# Altium PCB PCB1.PcbDoc
Units mm, origin at the board's own origin, x right, y up, seen from the top; angles counter-clockwise.
Board outline 90.93 x 99.19 mm, 2 copper layers (Top Layer, Bottom Layer); 70 components, 36 nets, 210 pads, 26 vias.
Unrouted connection lines stored in the file: 4.
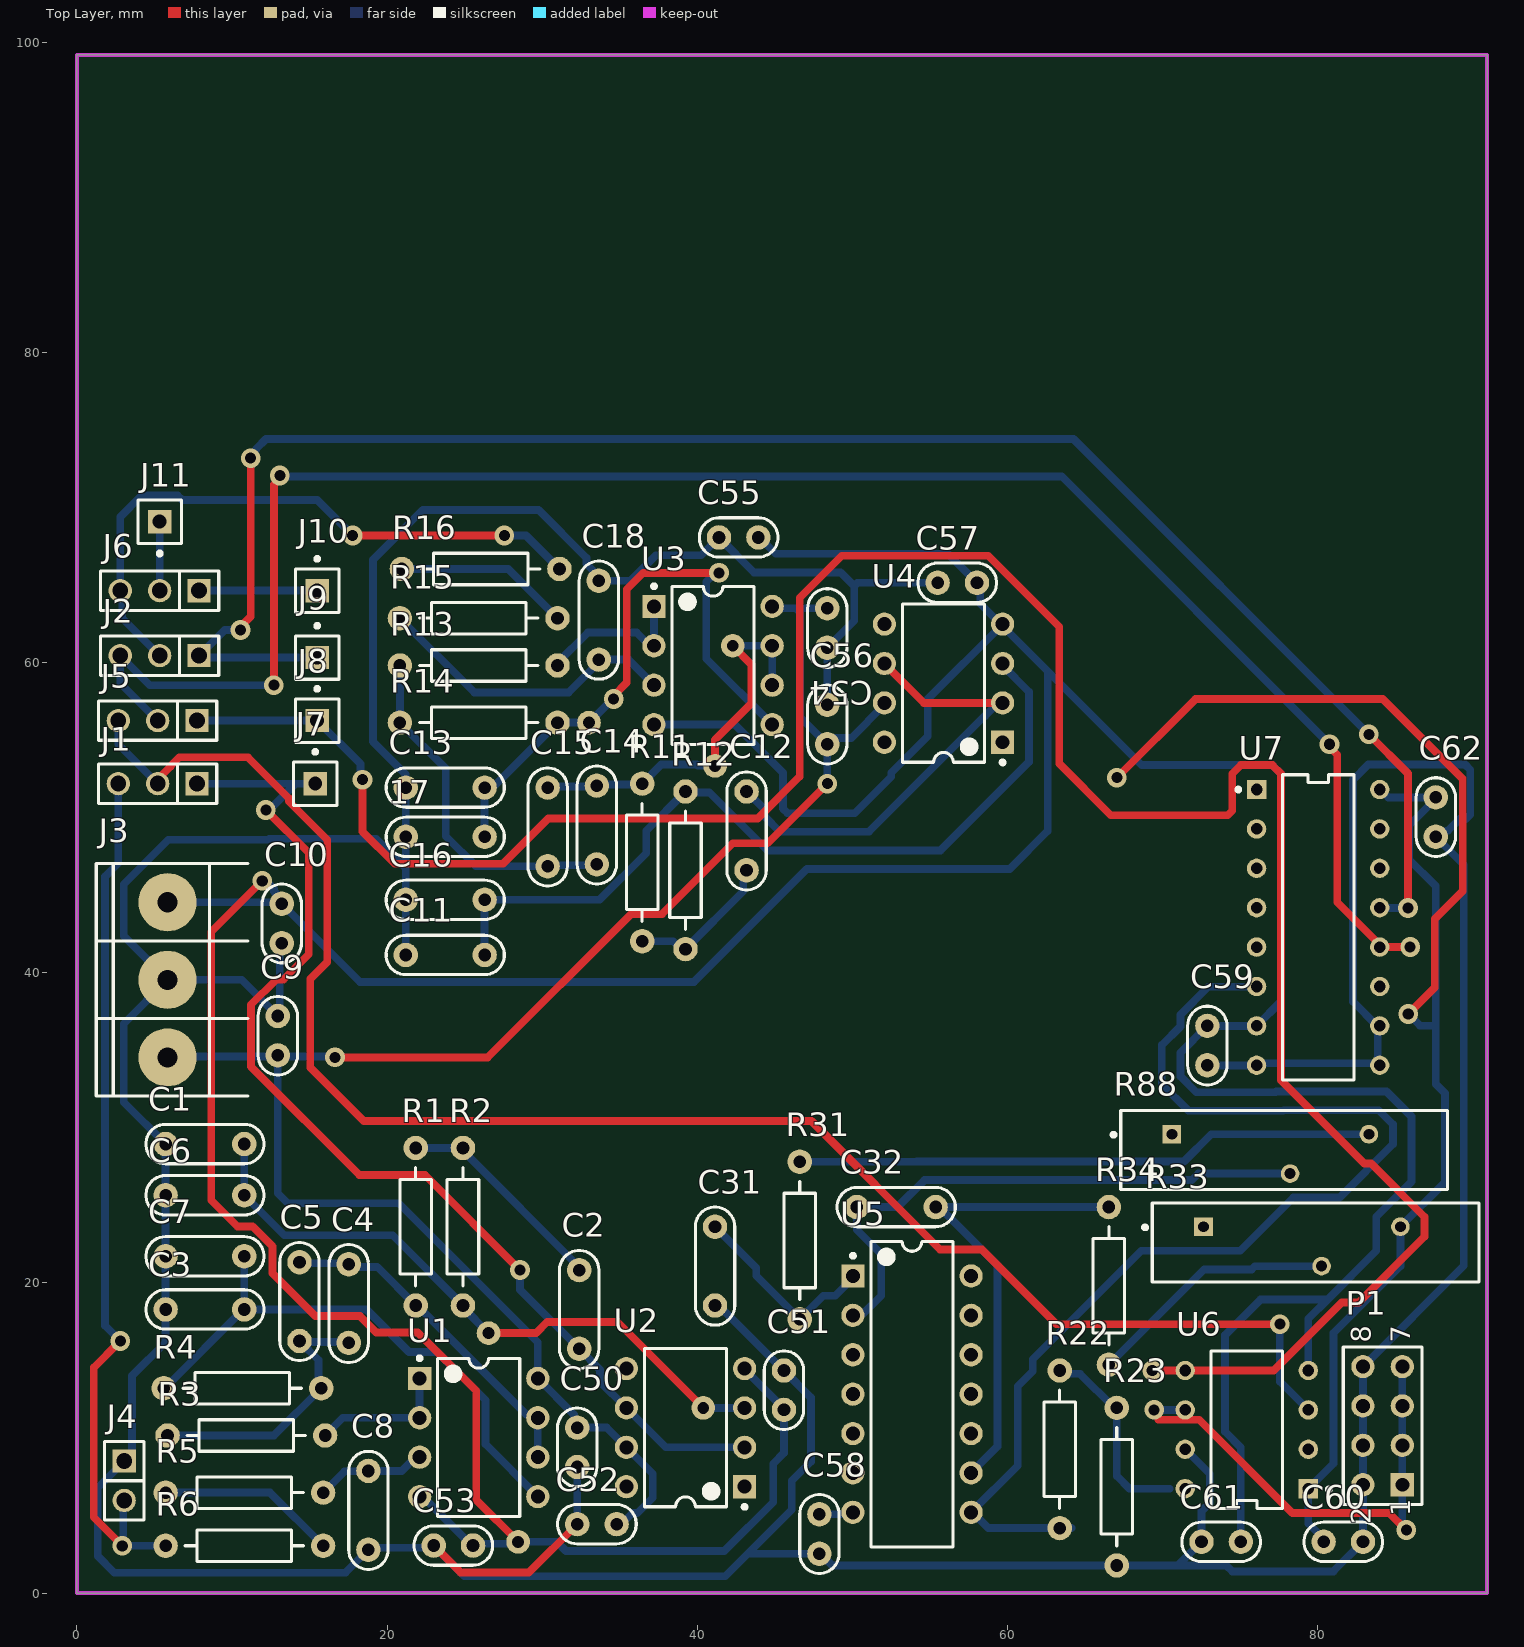
[diagram p0: Top Layer view]
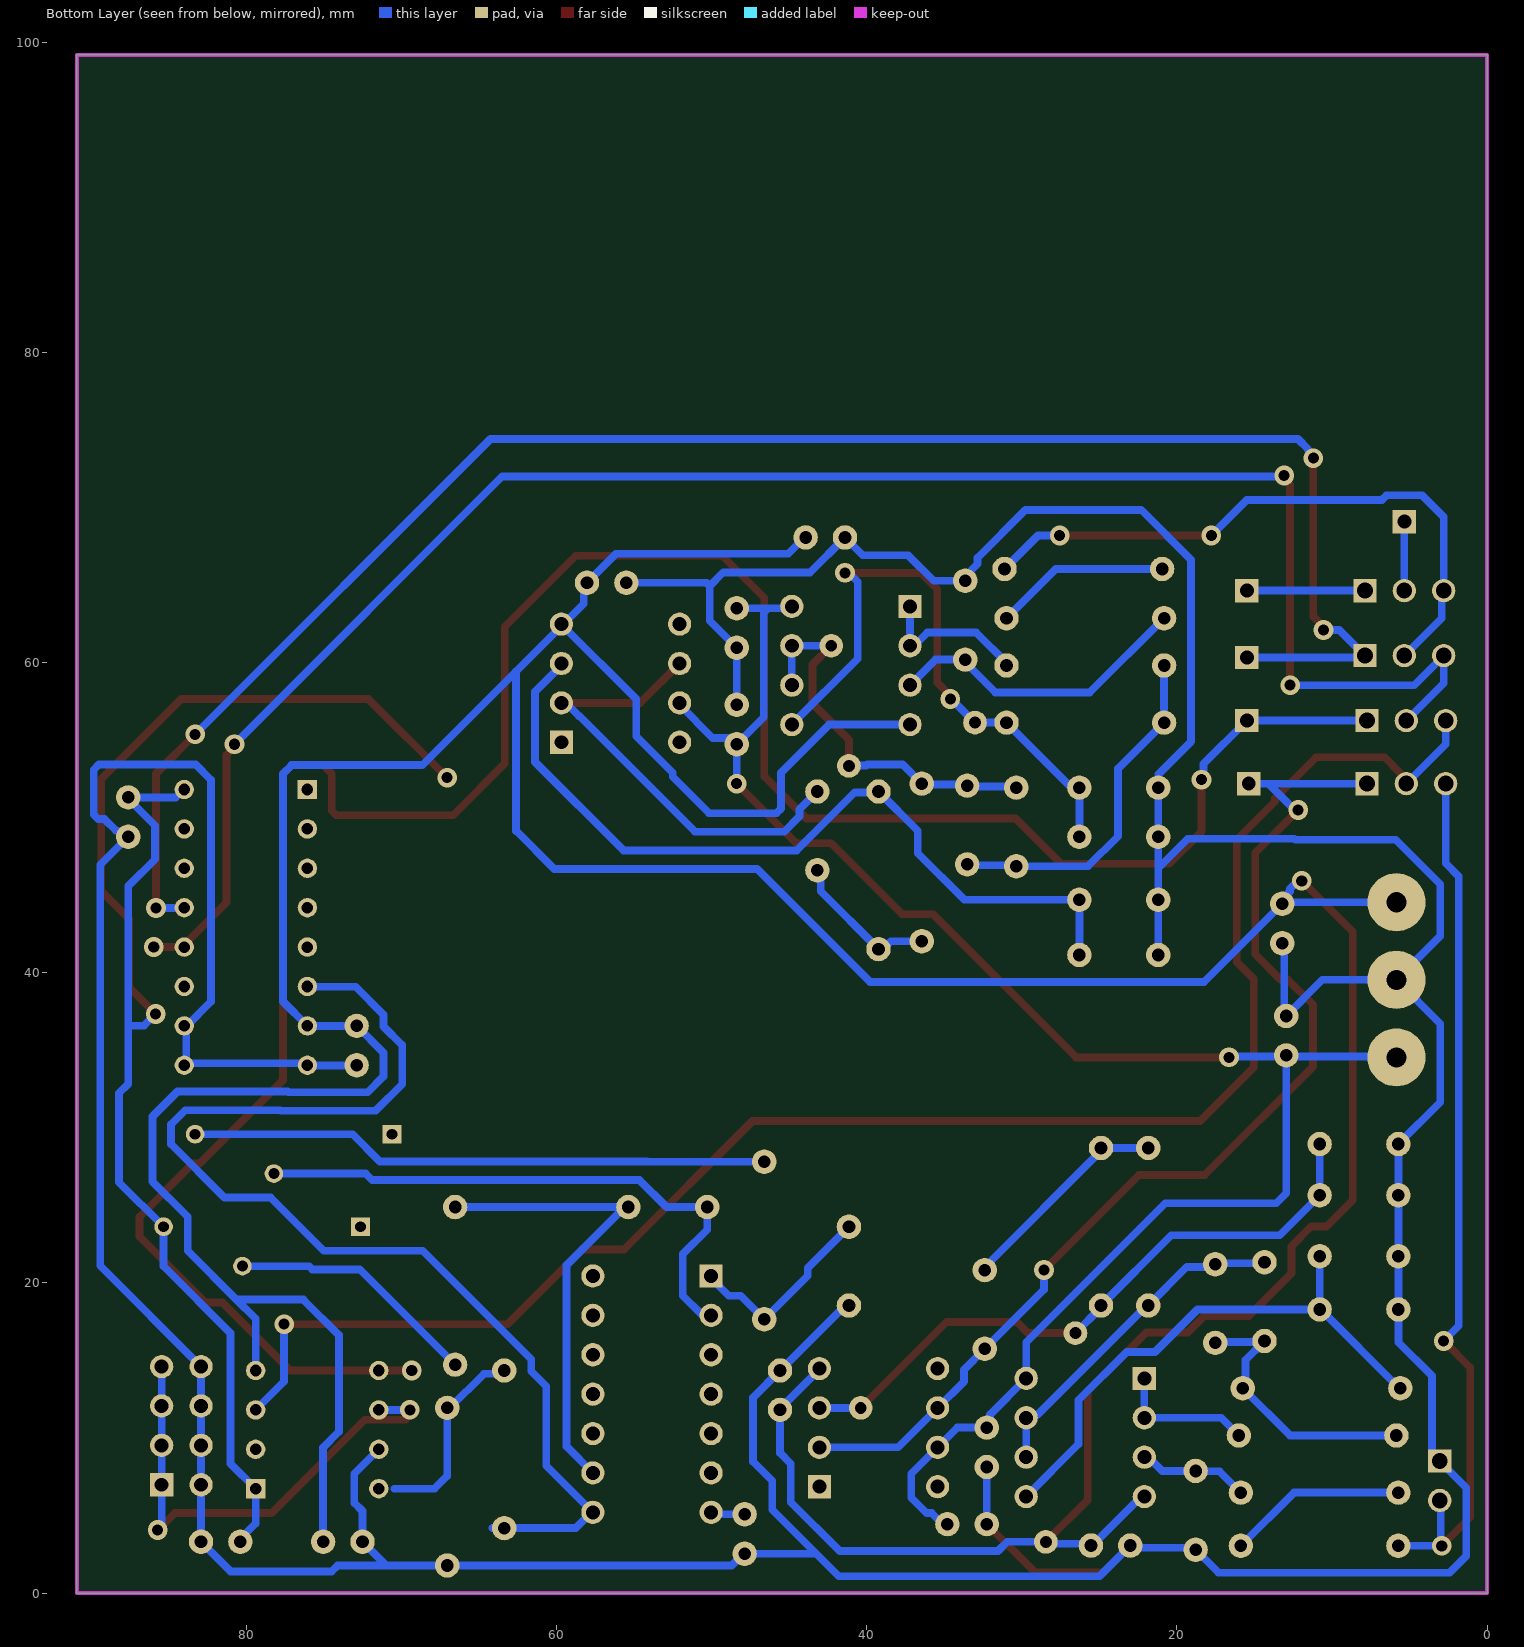
[diagram p1: Bottom Layer view, seen from below]
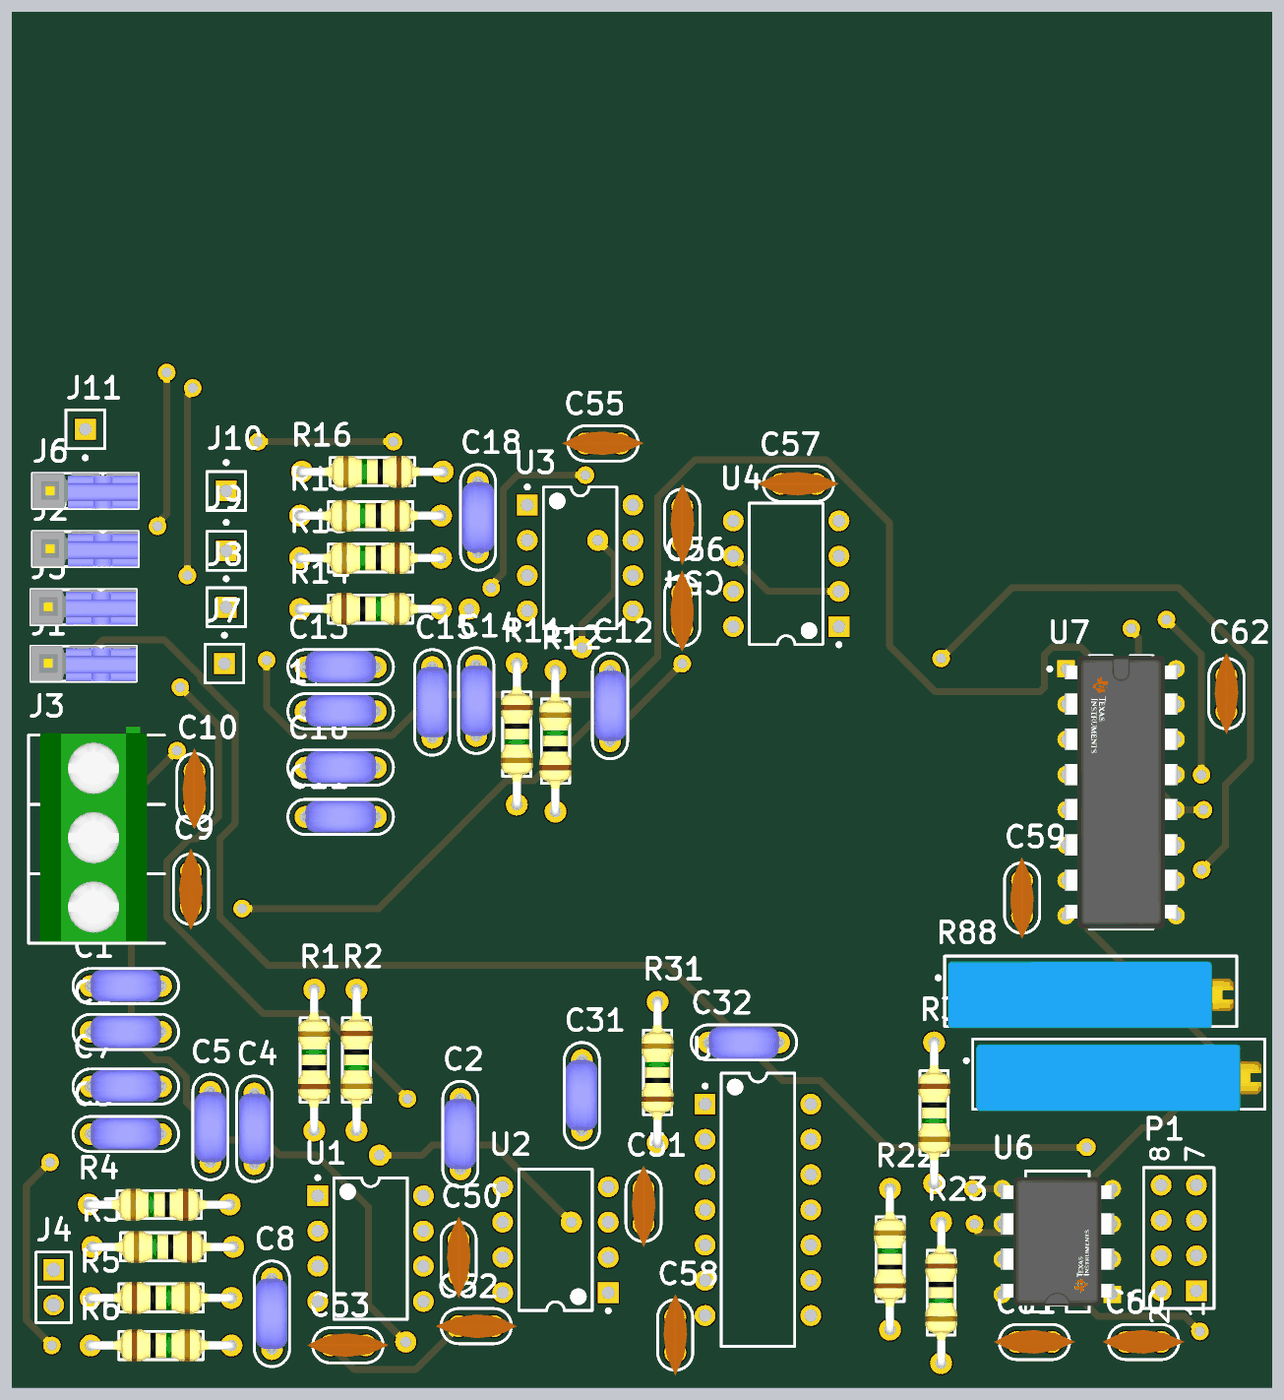
[diagram p2: 3D render of the assembled board from above, using the file's embedded part models]

## Layer stack, top to bottom
Top Solder: solder mask 0.0102, Solder Resist, Dk 3.5
Top Layer: signal copper 0.0356
Dielectric 1: dielectric 0.32, FR-4, Dk 4.8
Bottom Layer: signal copper 0.0356
Bottom Solder: solder mask 0.0102, Solder Resist, Dk 3.5

## Board outline
0,0 0,99.187 90.932,99.187 90.932,0

## Design rules (kind name [scope] priority, off if disabled: settings)
Clearance [All] p1: gap=0.7 ignorepadtopadclearanceinfootprint=FALSE
PolygonConnect [All] p1: connectstyle=Relief reliefconductorwidth=0.254 reliefentries=4 polygonreliefangle="90 Angle" airgapwidth=0.254
RoutingVias [All] p1: holewidth=0.7 width=2 viastyle="Through Hole" minholewidth=0.7 minwidth=2 maxholewidth=0.7 maxwidth=2
SolderMaskExpansion [All] p1: expansion=0.102 istentingtop=FALSE
Width [All] p1: maxlimit=1 minlimit=0.254 preferedwidth=0.5
30 further rules are at their usual default settings.

## Components (designator, comment, footprint, x,y, rotation, side; value= is the part's Value field where it differs from the comment)
17 "3.9p" CAP200 23.749,48.768 r180 top
C1 "120p" CAP200 8.255,28.956 r180 top
C2 "18n" CAP200 32.385,18.288 r270 top
C3 "82p" CAP200 8.255,18.288 r180 top
C4 "39p" CAP200 17.526,18.669 r90 top
C5 "820p" CAP200 14.351,18.796 r90 top
C6 "27p" CAP200 8.255,25.654 r180 top
C7 "3.9p" CAP200 8.255,21.717 r180 top
C8 "1n" CAP200 18.796,5.334 r270 top
C9 "10n" CAP100 12.954,35.941 r90 top
C10 "10n" CAP100 13.208,43.18 r90 top
C11 "120p" CAP200 23.749,41.148 r180 top
C12 "18n" CAP200 43.18,49.149 r90 top
C13 "82p" CAP200 23.749,51.943 r180 top
C14 "39p" CAP200 33.528,49.53 r90 top
C15 "820p" CAP200 30.353,49.403 r90 top
C16 "27p" CAP200 23.749,44.704 r180 top
C18 "1n" CAP200 33.655,62.738 r90 top
C31 "100p" CAP200 41.148,21.082 r270 top
C32 "100p" CAP200 52.832,24.892 r0 top
C50 "100n" CAP100 32.258,9.398 r270 top
C51 "100n" CAP100 45.593,13.081 r270 top
C52 "100n" CAP100 33.528,4.445 r180 top
C53 "100n" CAP100 24.273,3.064 r0 top
C54 "100n" CAP100 48.387,62.23 r270 top
C55 "100n" CAP100 42.672,68.072 r0 top
C56 "100n" CAP100 48.387,56.007 r90 top
C57 "100n" CAP100 56.769,65.151 r0 top
C58 "100n" CAP100 47.879,3.81 r270 top
C59 "100n" CAP100 72.898,35.306 r90 top
C60 "100n" CAP100 81.661,3.302 r0 top
C61 "100n" CAP100 73.787,3.302 r0 top
C62 "100n" CAP100 87.63,50.038 r270 top
J1 "JUMPER" JUMPER3 5.207,52.197 r180 top
J2 "JUMPER" JUMPER3 5.334,60.452 r180 top
J3 "BOR 3" BORNERA3 5.842,39.544 r0 top
J4 "CON2" SIP2 3.048,7.239 r270 top
J5 "JUMPER" JUMPER3 5.207,56.261 r180 top
J6 "JUMPER" JUMPER3 5.334,64.643 r180 top
J7 "Socket" PIN1 15.367,52.197 r0 top
J8 "Socket" PIN1 15.494,56.261 r0 top
J9 "Socket" PIN1 15.494,60.325 r0 top
J10 "Socket" PIN1 15.494,64.643 r0 top
J11 "Socket" PIN1 5.334,69.088 r180 top
P1 "Header 4X2" HDR2X4 85.471,6.985 r90 top
R1 "2.2k" RES400 21.844,18.542 r90 top
R2 "2.2k" RES400 24.892,28.702 r270 top
R3 "33k" RES400 16.002,10.16 r180 top
R4 "12k" RES400 15.748,13.208 r180 top
R5 "220" RES400 5.715,6.477 r0 top
R6 "12K" RES400 5.715,3.048 r0 top
R11 "2.2k" RES400 36.449,52.197 r270 top
R12 "2.2k" RES400 39.243,41.529 r90 top
R13 "33k" RES400 30.988,59.817 r180 top
R14 "12k" RES400 20.828,56.134 r0 top
R15 "220" RES400 30.988,62.865 r180 top
R16 "12K" RES400 31.115,66.04 r180 top
R22 "2k2" RES400 63.373,4.191 r90 top
R23 "2k2" RES400 67.056,11.938 r270 top
R31 "100k" RES400 46.609,17.653 r90 top
R33 "3006P-1-103LF" FP-3006P-MFG 79.879,22.607 r0 top
R34 "2k2" RES400 66.548,24.892 r270 top
R88 "3006P-1-103LF" FP-3006P-MFG 77.847,28.576 r0 top
U1 "TL082CP" P0008A 25.908,10.033 r0 top
U2 "LF356N" P0008A 39.243,10.668 r180 top
U3 "TL082CP" P0008A 41.021,59.817 r0 top
U4 "LF356N" P0008A 55.88,58.674 r180 top
U5 "CD40106BE" N0014A 53.848,12.827 r0 top
U6 "LF398N/NOPB" FP-P0008A-MFG 75.438,10.541 r180 top
U7 "CD4052BE" FP-N0016A-MFG 80.043,42.926 r0 top

## Footprints (in the part's own frame and the unit in brackets; to place one, negate y for a bottom-side part, rotate by r counter-clockwise, add the part's x,y. Pads: shape width x height; smd on the part's side, far side on the other; paste and mask are expansions set on the pad)
BORNERA3 [mm] "Bornera con Tornillos 5mm separación"
  round 3.75 hole 1.3: 1(0,5) 2(0,0) 3(0,-5)
  silkscreen extent -4.6,-7.5 5.2,7.5, body extent -3.76,-7.39 3.94,8.11, height 10.05
CAP100 [mil]
  round 62 hole 32: 1(-50,0) 2(50,0)
  silkscreen extent -100,-50 100,50, body extent -115,-33 115,34, height 241
CAP200 [mil]
  round 62 hole 32: 1(-100,0) 2(100,0)
  silkscreen extent -150,-50 150,50, body extent -110,-46 110,44, height 246
FP-3006P-MFG [mm]
  rect 1.2x1.2 hole 0.7 paste-1000 mask+0: 1(-7.235,1.015)
  round 1.2 hole 0.7 paste-1000 mask+0: 2(0.385,-1.525) 3(5.465,1.015)
  silkscreen extent -11.12,-2.54 10.54,2.54, body extent -10.64,-2.64 10.64,2.64, height 0.25
FP-N0016A-MFG [mm]
  rect 1.25x1.25 hole 0.75 paste-1000 mask+0: 1(-3.97,8.89)
  round 1.25 hole 0.75 paste-1000 mask+0: 2(-3.97,6.35) 3(-3.97,3.81) 4(-3.97,1.27) 5(-3.97,-1.27) 6(-3.97,-3.81) 7(-3.97,-6.35) 8(-3.97,-8.89) 9(3.97,-8.89) 10(3.97,-6.35) 11(3.97,-3.81) 12(3.97,-1.27) 13(3.97,1.27) 14(3.97,3.81) 15(3.97,6.35) 16(3.97,8.89)
  silkscreen extent -5.27,-9.84 2.3,9.84, body extent -4.69,-9.94 4.69,9.94, height 0.25
FP-P0008A-MFG [mm]
  rect 1.25x1.25 hole 0.75 paste-1000 mask+0: 1(-3.97,3.81)
  round 1.25 hole 0.75 paste-1000 mask+0: 2(-3.97,1.27) 3(-3.97,-1.27) 4(-3.97,-3.81) 5(3.97,-3.81) 6(3.97,-1.27) 7(3.97,1.27) 8(3.97,3.81)
  silkscreen extent -5.42,-5.08 2.3,5.08, body extent -4.69,-5.18 4.69,5.18, height 0.25
HDR2X4 [mm] "Connector; Header; 4x2 Position"
  rect 1.5x1.5 hole 0.9: 1(0,0)
  round 1.5 hole 0.9: 2(0,2.54) 3(2.54,0) 4(2.54,2.54) 5(5.08,0) 6(5.08,2.54) 7(7.62,0) 8(7.62,2.54)
  silkscreen extent -1.27,-1.27 8.89,3.81
JUMPER3 [mm]
  rect 1.5x1.5 hole 1.016: 1(-2.54,0)
  round 1.5 hole 1.016: 2(0,0) 3(2.54,0)
  silkscreen extent -3.81,-1.27 3.81,1.27, body extent -3.81,-1.3 3.81,1.27, height 16.15
N0014A [mm] "DIP, 14-Leads, Body 19.7x6.6mm, Pitch 2.54mm"
  rect 1.5x1.5 hole 0.9: 1(-3.81,7.62)
  round 1.5 hole 0.9: 2(-3.81,5.08) 3(-3.81,2.54) 4(-3.81,0) 5(-3.81,-2.54) 6(-3.81,-5.08) 7(-3.81,-7.62) 8(3.81,-7.62) 9(3.81,-5.08) 10(3.81,-2.54) 11(3.81,0) 12(3.81,2.54) 13(3.81,5.08) 14(3.81,7.62)
  silkscreen extent -3.93,-9.85 2.65,9.85, body extent -3.95,-9.85 3.95,9.85, height 5.08
P0008A [mm] "DIP, 8-Leads, Body 10.15x6.6mm, Pitch 2.54mm"
  rect 1.5x1.5 hole 0.9: 1(-3.81,3.81)
  round 1.5 hole 0.9: 2(-3.81,1.27) 3(-3.81,-1.27) 4(-3.81,-3.81) 5(3.81,-3.81) 6(3.81,-1.27) 7(3.81,1.27) 8(3.81,3.81)
  silkscreen extent -3.93,-5.1 2.65,5.23, body extent -3.95,-5.07 3.95,5.07, height 5.08
PIN1 [mm] "Connector; Plug"
  rect 1.5x1.5 hole 0.9: 1(0,0)
  silkscreen extent -1.4,-1.4 1.4,2.17
RES400 [mil]
  round 62 hole 32: 1(0,0) 2(400,0)
  silkscreen extent 50,-40 350,40, body extent -12,-45 412,46, height 96
SIP2 [mm]
  rect 1.5x1.5 hole 1.016: 1(-1.27,0)
  round 1.5 hole 1.016: 2(1.27,0)
  silkscreen extent -2.54,-1.27 2.54,1.27

## Part data
17 C1 C2 C3 C4 C5 C6 C7 C8 C9 C10 C11 C12 C13 C14 C15 C16 C18 C31 C32 C50 C51 C52 C53 C54 C55 C56 C57 C58 C59 C60 C61 C62: library part CAP
J1 J2 J5 J6: library part JUMPER3
J3: library part "BORNERA 3"
P1: "Header, 4-Pin, Dual row", LatestRevisionDate=17-Jul-2002, LatestRevisionNote="Re-released for DXP Platform.", Publisher="Altium Limited"
R1 R2 R3 R4 R5 R6 R11 R12 R13 R14 R15 R16 R22 R23 R31 R34: library part RES
R33 R88: library part CMP-07234-000047-1, "TRIMMER 10KOHM 0.75W PC PIN SIDE", Color=Blue, Insulation Resistance=1GR, Manufacturer Series=3006, Max Operating Temperature=125°C, Max Power Dissipation=750mW, Min Operating Temperature=-55°C, Package Quantity=100, Resistance=10kR, Resistance Law=Linear, Resistance Tolerance=10%, Resistor Type=Cermet, Temperature Coefficient=100ppm/°C, Actuator Orientation=Horizontal, Actuator Type=SCREW, Depth=4.83mm, Height=6.35mm, Lead Free="Lead Free", Length=20.57mm, Military Standard=Not, Mount=Panel, Number of Pins=3, Number of Terminals/Pins=3, Number of Turns=15, Packaging=Rail/Tube, Pin Diameter=0.6mm, Pitch=2.5mm, Power Rating=750mW, Radiation Hardening=No, REACH SVHC="No SVHC", RoHS Compliant=Yes, Series=3006, Taper=Linear, Technology=CERMET, Terminal Finish=Tin, Termination=Pin, Thickness=5.59mm, Tolerance=10%, Type=Potentiometer, Weight=0.04oz, Width=4.83mm
U1 U3: library part CMP-0055-00158-5, "JFET-Input Operational Amplifier, 7 to 36 V, 0 to 70 degC, 8-pin DIP (P8), Pb-Free (RoHS)", Manufacturer="Texas Instruments", Rating=Catalog, Total Supply Voltage(Max)(+5V is 5, +/-5V is 10)=36, Total Supply Voltage(Min)(+5V is 5, +/-5V is 10)=7, CMRR(Min)(dB)=70, Code_JEDEC=MS-001, ComponentLink1Description="Manufacturer URL", ComponentLink1URL=http://www.ti.com/, ComponentLink2Description=Datasheet, ComponentLink2URL=http://www.ti.com/lit/ds/symlink/tl082.pdf, ComponentLink3Description="Package Specification", ComponentLink3URL=http://www.ti.com/litv/pdf/mpdi001b, DatasheetVersion=SLOS081G, Eco-Plan="Pb-Free (RoHS)", GBW(Typ)(MHz)=3, IIB(Max)(pA)=400, Iq per channel(Max)(mA)=2.8, Mounting Technology="Through Hole", Number of Channels=2, Offset Drift(Typ)(uV/C)=18, PackageDescription="8-Pin Plastic In-Line, Body 9.59 x 6.35 mm, Pitch 2.54 mm", PackageReference=P0008A, PackageVersion="4040082/E, 04/2010", PartNumber=TL082CP, Slew Rate(Typ)(V/us)=13, Sub Family="General Purpose Amplifier, High Supply Voltage Amplifier (>=30V)", Vio (25C)(Max)(mV)=15, Vn at 1kHz(Typ)(nV/rtHz)=18
U2 U4: library part CMP-0055-00204-3, "JFET Input Operational Amplifier, 8-pin MDIP", Manufacturer="Texas Instruments", Package Reference=P0008A, PackageTopMarking=NSUZXYTTE#*LF*356N, PowerWise=N, Code_JEDEC=MS-001-BA, ComponentLink1Description="Datasheet URL", ComponentLink1URL=http://www.ti.com/general/docs/lit/getliterature.tsp?genericPartNumber=LF356&fileType=pdf, CompType=Amplifiers, PackageDescription="MDIP, .365 x .250 x .130in, 8 Lead, .100in Pitch", PinCount=8, RoHS=N
U5: library part CMP-1615-00909-3, "CMOS Hex Schmitt Triggers, N0014A, TUBE", F @ Nom Voltage(Max)(Mhz)=12, Generic Part Number=CD40106B, ICC @ Nom Voltage(Max)(mA)=0.03, Manufacturer="Texas Instruments", Operating Temperature Range(C)="-55 to 125", Rating=Catalog, tpd @ Nom Voltage(Max)(ns)=280, Voltage(Nom)(V)=5, Bits(#)=6, Code_JEDEC=MS-001, DatasheetVersion=SCHS097D, Input Type=CMOS, Output Drive (IOL/IOH)(Max)(mA)=-1/1, Output Type=CMOS, PackageReference=N0014A, Schmitt Trigger=Yes, Technology Family=CD4000, VCC(Max)(V)=18, VCC(Min)(V)=3
U6: library part CMP-04895-000240-1, "IC OPAMP SAMPL/HOLD 1 CIRC 8DIP", Case/Package=PDIP, Dual Supply Voltage=15V, Input Bias Current=10nA, Input Offset Voltage (Vos)=2mV, Max Dual Supply Voltage=18V, Max Operating Temperature=70°C, Min Dual Supply Voltage=5V, Min Operating Temperature=0°C, Nominal Supply Current=4.5mA, Package Quantity=40, Bandwidth=1MHz, Contact Plating=Tin, Gain Bandwidth Product=1MHz, Height=3.3mm, Lead Free="Lead Free", Length=9.27mm, Max Supply Voltage=18V, Min Supply Voltage=5V, Mount="Through Hole", Number of Amplifiers=1, Number of Channels=1, Number of Circuits=1, Number of Pins=8, Operating Supply Voltage=15V, Packaging=Rail/Tube, Radiation Hardening=No, REACH SVHC="No SVHC", RoHS Compliant=Yes, Series=LF398-N, Supply Current=4.5mA, Weight=0.032805oz, Width=6.35mm
U7: library part CMP-1575-00066-5, "IC MUX/DEMUX DUAL 4X1 16DIP", Case/Package=PDIP, Max Dual Supply Voltage=9V, Max Input Voltage=20V, Max Operating Temperature=125°C, Min Dual Supply Voltage=2.5V, Min Operating Temperature=-55°C, Min Supply Voltage=3V, Nominal Supply Current=80nA, On-State Resistance=240R, Operating Supply Voltage=18V, Package Quantity=25, Bandwidth=25MHz, Contact Plating=Gold, Lead Free="Lead Free", Logic Function=Multiplexer, Max Supply Voltage=20V, Mount="Through Hole", Number of Bits=4, Number of Channels=2, Number of Circuits=2, Number of Inputs=8, Number of Outputs=2, Number of Pins=16, Number of Terminals/Pins=16, Operating Supply Current=80nA, Packaging=Rail/Tube, Polarity=Non-Inverting, Propagation Delay=60ns, Quiescent Current=80nA, Radiation Hardening=No, REACH SVHC="No SVHC", RoHS Compliant=Yes, Supply Type=Single, Throw Configuration=SP4T, Turn-Off Delay Time=450ns, Turn-On Delay Time=720ns, Weight=0.03357oz, Width=7.62mm
J7 J8 J9 J10 J11: LatestRevisionDate=17-Jul-2002, LatestRevisionNote="Re-released for DXP Platform.", Publisher="Altium Limited"

## Free pads (board coordinates)
  round 1.524 hole 0.762: 2(40.386,11.938) 4(26.543,16.764) 6(28.448,3.302) 10(33.02,56.134) 13(41.148,53.34) 14(42.291,61.087)

## Via types
v1: diameter 1.27, hole 0.711, Top Layer to Bottom Layer, 26 vias

## Nets (pads, with @x,y where several pads share a name; then routed paths per layer and width w, separated by ;. In a path a pad name is that pad's centre, name@x,y a point inside that pad or via, vN(x,y) a via of type N, cw(c..) or ccw(c..) an arc to the next point about the centre after c; other vN are vias at no path point)
-VCC: C10.2 C51.2 C53.2 C55.2 C57.2 C59.2 C61.2 J3.1 pad.6 U1.4 U2.4 U3.4 U4.4 U6.4 U7.7 | length 320.7
  Top Layer w0.5: v1(11.949,45.924) 8.667,42.642 8.667,25.325 10.347,23.645 11.324,23.645 12.614,22.355 12.614,20.616 15.364,17.866 18.246,17.866 19.307,16.805 21.98,16.805 25.747,13.038 25.747,6.003 pad.6
  Bottom Layer w0.5: J3.1 C10.2@13.114,44.544 ; v1(11.949,45.924) 12.097,45.777 12.352,45.777 12.71,45.419 12.71,45.239 13.114,44.835 C10.2@13.114,44.544 ; U1.4 22.3,6.223 25.46,3.064 C53.2 25.662,3.183 28.329,3.183 pad.6@28.448,3.064 ; pad.6 30.944,3.302 31.538,2.708 41.746,2.708 44.901,5.862 44.901,8.345 45.593,9.037 C51.2 45.593,11.874 43.053,14.414 U2.4 ; U3.4 42.427,56.007 45.534,52.9 45.534,50.585 45.827,50.292 50.165,50.292 52.51,52.637 52.51,52.9 54.864,55.254 54.864,57.658 U4.4@59.563,62.357 ; C55.2 44.011,68.072 45.064,67.019 56.171,67.019 C57.2 58.245,64.945 58.245,63.802 62.611,59.436 ; C61.2 75.057,9.385 74.041,10.401 74.041,16.637 76.327,18.923 80.645,18.923 ; U7.7@75.93,36.56 75.922,36.568 72.906,36.568 C59.2 71.161,34.839 71.161,33.316 72.178,32.299 77.299,32.299 77.342,32.341 84.451,32.341 86.062,30.73 86.062,26.532 83.794,24.264 83.794,22.072 80.645,18.923 ; U7.7 77.648,38.151 77.648,52.835 77.092,53.391 68.689,53.391 68.672,53.375 62.611,59.436 ; U6.4 79.408,17.686 80.645,18.923 ; C10.2@13.114,44.544 C10.2 18.247,39.411 39.792,39.411 47.073,46.692 60.154,46.692 62.611,49.149 62.611,59.436
GND: 17.2 C1.2 C3.2 C6.2 C7.2 C8.2 C9.2 C10.1 C11.2 C13.2 C16.2 C18.2 C31.2 C50.2 C51.1 C52.2 C53.1 C54.2 C55.1 C56.2 C57.1 C58.2 C59.1 C60.2 C61.1 C62.2 J3.2 J4.1 P1.2 P1.4 P1.6 P1.8 R23.2 U6.7 U7.8 U7.9 U7.10 | length 381
  Top Layer w0.5: C53.1 24.74,1.326 29.139,1.326 C52.2
  Bottom Layer w0.5: C10.1 13.081,41.783 13.081,37.338 C9.2 10.621,39.544 J3.2 ; C11.2 C16.2 21.209,46.736 ; C52.2 C50.2 ; C31.2 41.393,18.542 45.584,14.351 C51.1 47.33,12.614 47.33,8.468 46.101,7.239 46.101,5.365 43.355,2.619 ; C56.2@48.387,57.531 C54.2 50.124,62.697 50.124,64.938 ; C57.1 50.338,65.151 50.124,64.938 ; U6.7 73.043,7.696 73.043,5.815 72.517,5.289 C61.1@72.517,3.429 ; C61.1 70.993,1.778 ; C59.1 72.906,34.028 75.922,34.028 U7.8@75.93,34.02 ; U7.8@75.946,34.163 83.886,34.163 83.886,36.576 83.87,36.56 82.295,38.135 82.295,52.452 83.269,53.426 89.515,53.426 89.855,53.086 89.855,50.204 89.562,49.911 89.154,49.911 88.408,49.165 88.317,49.165 87.921,48.768 C62.2 89.425,46.973 89.425,21.099 P1.8 P1.6 P1.4 P1.2 C60.2 81.026,1.397 74.505,1.397 74.124,1.778 70.993,1.778 ; J3.2 3.017,36.719 3.017,31.654 C1.2 C6.2 C7.2 C3.2 5.715,16.175 3.548,14.008 3.548,9.009 J4.1 1.336,6.797 1.336,2.391 2.417,1.311 17.313,1.311 C8.2 18.931,2.929 22.868,2.929 C53.1 24.989,1.077 41.813,1.077 43.355,2.619 ; J3.2 3.017,42.369 3.017,45.714 5.883,48.58 12.363,48.58 12.424,48.641 19.304,48.641 21.209,46.736 ; 21.209,46.736 17.2 C13.2 21.209,52.788 19.091,54.906 19.091,66.633 22.308,69.85 29.762,69.85 32.852,66.76 32.852,66.371 33.655,65.569 C18.2 35.687,65.278 37.338,66.929 40.259,66.929 C55.1 43.655,65.819 49.243,65.819 50.124,64.938 ; 43.355,2.619 43.434,2.54 C58.2 47.947,2.54 48.709,1.778 R23.2 70.993,1.778
InFAA: J1.3 J4.2 R6.1 | length 56.8
  Top Layer w0.5: v1@2.667,16.129 1.077,14.539 1.077,4.892 v1(2.921,3.048)
  Bottom Layer w0.5: J1.3 2.667,47.061 1.817,46.211 1.817,17.238 2.794,16.261 v1(2.794,16.256) ; v1(2.921,3.048) 2.984,3.111 2.984,5.905 J4.2 ; v1@3.048,3.048 R6.1
InFR: J2.2 J6.3 R16.1 | length 40.9
  Top Layer w0.5: v1(17.78,68.199) v1(27.559,68.199)
  Bottom Layer w0.5: J2.2 2.914,62.872 2.914,64.523 J6.3 2.794,69.392 4.19,70.788 6.478,70.788 6.781,70.485 15.494,70.485 v1(17.78,68.199) ; v1(27.559,68.199) 28.956,68.199 R16.1
InKey: J2.3 J5.2 U7.12 | length 120.8
  Top Layer w0.5: v1(12.7,58.547) 12.7,71.481 13.081,71.862 v1(13.081,72.07) ; v1(80.772,54.737) 80.772,54.567 81.28,54.059 81.28,44.542 84.013,41.809 U7.12 v1(85.979,41.656)
  Bottom Layer w0.5: J5.2 2.794,58.674 J2.3 4.699,58.547 v1(12.7,58.547) ; v1(13.081,72.07) 13.142,72.009 63.5,72.009 v1(80.772,54.737)
InSH: J1.2 J5.3 U6.3 | length 110.1
  Top Layer w0.5: J1.2 5.207,52.468 6.047,53.308 6.047,53.341 6.603,53.897 11.023,53.897 13.667,51.253 13.667,51.053 16.145,48.575 16.145,40.693 15.052,39.6 15.052,33.887 18.5,30.439 47.368,30.439 55.66,22.147 58.362,22.147 63.171,17.338 v1(77.572,17.338)
  Bottom Layer w0.5: J5.3 2.667,54.737 J1.2 ; v1(77.572,17.338) 77.572,13.647 U6.3
Net17_1: 17.1 C13.1 pad.10 R14.2 U3.5 | length 39.1
  Top Layer w0.5: v1(34.608,57.658) 34.608,57.866 35.462,58.721 35.462,64.721 36.527,65.786 v1(41.402,65.786)
  Bottom Layer w0.5: 17.1 26.289,51.435 R14.2 pad.10@32.766,56.134 ; pad.10 34.544,57.658 v1(34.608,57.658) v1@34.671,57.658 ; v1@41.275,65.913 40.579,65.217 40.579,60.259 U3.5
NetC1_1: C1.1 C6.1 pad.2 pad.4 R2.2 U2.3 | length 41.9
  Top Layer w0.5: pad.4 29.602,16.764 30.323,17.485 34.839,17.485 pad.2
  Bottom Layer w0.5: C1.1 C6.1 13.376,23.073 20.361,23.073 R2.2 24.892,18.415 pad.4 ; pad.2 U2.3
NetC2_1: C2.1 R1.2 R2.1 | length 14
  Bottom Layer w0.5: R1.2 R2.1 24.892,28.511 32.385,21.018 C2.1
NetC3_1: C3.1 C7.1 R4.2 U1.5 | length 36.3
  Bottom Layer w0.5: R4.2 5.651,13.208 10.731,18.288 C3.1 ; C7.1 C3.1 ; U1.5 26.35,9.591 26.35,12.434 23.242,15.543 21.414,15.543 18.669,18.288 C3.1
NetC4_1: C4.1 C5.1 R3.2 R4.1 | length 17.9
  Bottom Layer w0.5: R3.2 12.7,10.16 R4.1 15.571,13.385 15.571,15.036 C5.1@14.414,16.192 ; C5.1 C5.1@14.414,16.192 ; C4.1 17.462,16.192 C5.1@14.414,16.192
NetC4_2: C4.2 C5.2 R1.1 U1.6 U1.7 | length 22
  Bottom Layer w0.5: C5.2 14.414,21.273 C4.2@17.462,21.273 ; C4.2 17.703,21.032 19.354,21.032 R1.1 21.94,18.542 28.987,11.494 29.527,11.494 U1.7 U1.6
NetC8_1: C8.1 R5.2 U1.3 | length 7.2
  Bottom Layer w0.5: R5.2 17.259,7.861 18.783,7.861 C8.1 20.938,7.874 21.827,8.763 U1.3
NetC11_1: C11.1 C16.1 R12.2 U4.3 | length 53.3
  Bottom Layer w0.5: C11.1 C16.1 33.699,44.704 36.706,47.711 36.706,49.152 R12.2 39.3,51.632 40.78,51.632 44.52,47.892 55.689,47.892 61.39,53.593 61.39,58.117 U4.3@59.69,59.817
NetC12_1: C12.1 R11.2 R12.1 | length 9.8
  Bottom Layer w0.5: R11.2@36.512,42.1 R11.2 38.444,42.037 38.952,41.529 R12.1 42.974,45.26 42.974,46.403 C12.1
NetC14_1: C14.1 C15.1 R13.2 R14.1 | length 22.1
  Bottom Layer w0.5: R13.2@20.828,59.055 R14.1 23.79,53.172 23.79,48.809 25.737,46.863 C15.1 30.416,46.926 33.465,46.926 C14.1
NetC14_2: C14.2 C15.2 pad.13 pad.14 R11.1 U3.6 U3.7 | length 25.7
  Top Layer w0.5: pad.13 41.148,55.017 43.495,57.364 43.495,59.883 pad.14
  Bottom Layer w0.5: C15.2 30.416,52.006 33.465,52.006 C14.2 33.591,52.133 36.386,52.133 37.678,53.426 39.963,53.426 40.029,53.36 41.128,53.36 pad.13 ; pad.14 U3.7 U3.6
NetC18_1: C18.1 R15.2 U3.3 | length 20
  Bottom Layer w0.5: R15.2 25.613,58.08 31.708,58.08 33.655,60.027 C18.1 35.56,60.198 U3.3
NetC31_1: C31.1 R31.1 U5.1 | length 13
  Bottom Layer w0.5: C31.1 43.806,20.964 43.806,20.456 R31.1 48.133,19.177 48.904,19.177 49.538,19.811 49.538,19.947 49.911,20.32 U5.1@50.165,20.32
NetC32_1: C32.1 R88.2 U5.2 | length 37.5
  Bottom Layer w0.5: U5.2@50.165,17.78 50.356,17.971 50.66,17.971 51.865,19.176 51.865,21.864 50.292,23.437 C32.1 52.915,24.892 54.652,26.629 71.891,26.629 72.313,27.051 R88.2
NetC32_2: C32.2 R34.1 U5.9 | length 30.3
  Bottom Layer w0.5: C32.2 C32.2@55.617,24.892 ; U5.9 59.358,9.447 59.358,21.151 58.362,22.147 C32.2@55.617,24.892 ; R34.1@66.294,24.892 C32.2@55.617,24.892
NetP1_1: P1.1 P1.3 P1.5 P1.7 U6.6 | length 31.6
  Top Layer w0.5: 69.723,11.176 72.369,11.176 78.389,5.156 84.633,5.156 v1(85.725,4.064)
  Bottom Layer w0.5: v1(69.469,11.811) U6.6 ; P1.7 P1.5 P1.3 P1.1 85.471,4.318 v1(85.725,4.064)
NetR3_1: R3.1 U1.1 U1.2 | length 9.1
  Bottom Layer w0.5: R3.1 17.145,11.303 U1.2 U1.1
NetR5_1: R5.1 R6.2 | length 11.6
  Bottom Layer w0.5: R5.1 12.446,6.477 R6.2
NetR13_1: R13.1 U3.1 U3.2 | length 10.6
  Top Layer w0.5: R13.1 R13.1@31.194,60.023
  Bottom Layer w0.5: R13.1@31.172,59.633 R13.1 30.988,59.988 32.935,61.935 36.092,61.935 36.94,61.087 U3.2 U3.1
NetR15_1: R15.1 R16.2 | length 11.3
  Bottom Layer w0.5: R16.2 27.813,66.04 R15.1
NetR22_2: R22.2 R23.1 U6.8 | length 12.8
  Bottom Layer w0.5: R22.2 63.579,14.145 64.678,14.145 66.885,11.938 R23.1 67.056,7.554 67.879,6.731 70.452,6.731
NetR31_2: R31.2 R88.3 | length 37.4
  Bottom Layer w0.5: R31.2 54.139,27.813 54.155,27.829 71.394,27.829 73.156,29.591 R88.3
NetR33_2: R33.2 R34.2 | length 16.3
  Bottom Layer w0.5: R34.2 72.688,20.872 75.762,20.872 75.972,21.082 R33.2
Oscilador: R22.1 U5.8 U7.6 | length 75.2
  Bottom Layer w0.5: R22.1@64.135,4.191 R22.1 58.763,4.191 57.747,5.207 U5.8 60.666,8.215 60.666,13.339 61.636,14.309 61.636,15.071 68.637,22.072 75.009,22.072 78.438,25.501 81.414,25.501 84.862,28.949 84.862,30.233 83.954,31.141 77.839,31.141 77.796,31.099 71.681,31.099 69.961,32.819 69.961,35.336 71.161,36.536 71.161,37.296 72.965,39.1 U7.6@75.93,39.1
OUT: J6.2 J11.1 | length 4.6
  Bottom Layer w0.5: J11.1@5.207,69.215 J11.1 J6.2
OutFAA: C2.2 J1.1 J7.1 U2.2 U2.6 | length 73.5
  Top Layer w0.5: v1(12.184,50.495) 14.945,47.733 14.945,41.19 13.316,39.561 12.846,39.561 11.217,37.931 11.217,33.951 18.203,26.965 22.438,26.965 v1(28.575,20.828)
  Bottom Layer w0.5: J1.1 14.097,52.197 ; v1(12.184,50.495) 12.392,50.495 13.094,51.197 13.097,51.197 14.097,52.197 ; J7.1 14.097,52.197 ; v1(28.575,20.828) 28.575,19.558 C2.2 33.733,14.4 33.733,13.638 U2.6 37.973,9.398 U2.2 42.862,9.207 U2.2@42.558,9.207
OutFR: C12.2 J6.1 J10.1 U4.2 U4.6 | length 37.6
  Top Layer w0.5: U4.6 54.61,57.404 U4.2
  Bottom Layer w0.5: J6.1 J10.1 ; C12.2 44.334,50.535 44.334,50.088 45.33,49.092 51.07,49.092 58.542,56.564 58.579,56.564 59.419,57.404 U4.2
OutKey: J2.1 J9.1 U7.13 | length 117.3
  Top Layer w0.5: v1(10.541,62.103) 10.541,62.311 11.205,62.975 v1(11.205,73.181) ; v1(83.312,55.372) 85.836,52.848 v1(85.836,44.18)
  Bottom Layer w0.5: v1(10.541,62.103) 9.525,62.103 J2.1 8.001,60.325 J9.1 ; v1(11.205,73.181) 11.205,73.389 11.557,73.741 11.557,73.787 12.192,74.422 64.262,74.422 v1(83.312,55.372) ; U7.13@83.87,44.18 v1(85.836,44.18) v1@85.852,44.196
OutSH: J5.1 J8.1 U6.5 | length 160.8
  Top Layer w0.5: v1(18.415,52.451) 18.415,49.105 20.489,47.031 27.473,47.031 30.394,49.952 43.9,49.952 46.609,52.661 46.609,64.179 49.318,66.888 58.759,66.888 63.341,62.306 63.341,53.499 66.675,50.165 74.205,50.165 74.498,50.458 74.498,52.834 75.055,53.391 77.091,53.391 77.648,52.834 77.648,33.063 83.009,27.702 83.457,27.702 86.894,24.264 86.894,22.98 82.653,18.739 81.569,18.739 77.181,14.351 U6.5 v1(69.342,14.351)
  Bottom Layer w0.5: J5.1 J8.1 18.288,53.467 v1@18.288,52.893
VCC: C9.1 C50.1 C52.1 C54.1 C56.1 C58.1 C60.1 C62.1 J3.3 R33.3 U1.8 U2.7 U3.8 U4.7 U6.1 U7.16 | length 220.5
  Top Layer w0.5: v1(16.637,34.544) 26.499,34.544 35.729,43.774 37.722,43.774 42.294,48.346 44.536,48.346 v1(48.387,52.197) ; v1(67.056,52.578) 72.136,57.658 84.201,57.658 89.367,52.492 89.367,45.275 87.564,43.471 87.564,39.05 v1(85.852,37.338)
  Bottom Layer w0.5: J3.3 5.905,34.608 12.89,34.608 C9.1 C9.1@12.954,34.238 ; v1(16.637,34.544) 16.573,34.608 13.323,34.608 C9.1@12.954,34.238 ; C52.1 35.089,4.445 35.802,5.158 36.137,5.158 37.133,6.154 37.133,7.698 U2.7 34.163,10.668 C50.1 32.052,10.874 32.052,11.509 U1.8 29.718,16.173 20.748,25.143 13.586,25.143 12.954,25.776 C9.1@12.954,34.238 ; U3.8 44.958,63.5 46.357,63.5 ; v1(48.387,52.197) C56.1 46.65,56.474 46.65,63.207 46.357,63.5 ; C56.1@48.387,54.991 48.527,55.131 49.924,55.131 52.07,57.277 U4.7@52.07,57.213 ; C54.1@48.514,63.5 C54.1 46.357,63.5 ; C60.1 80.391,3.51 79.408,4.493 U6.1 81.026,8.349 81.026,16.764 85.344,21.082 R33.3 88.225,26.503 88.225,32.234 87.63,32.829 87.63,36.576 ; U7.16@83.87,51.8 84.073,51.8 84.565,51.308 C62.1 87.63,51.225 85.893,49.488 85.893,47.33 87.63,45.593 87.63,36.576 ; v1(85.852,37.338) 86.614,36.576 87.63,36.576
pads on no net: R33.1 R88.1 U2.1 U2.5 U2.8 U4.1 U4.5 U4.8 U5.3 U5.4 U5.5 U5.6 U5.7 U5.10 U5.11 U5.12 U5.13 U5.14 U6.2 U7.1 U7.2 U7.3 U7.4 U7.5 U7.11 U7.14 U7.15
copper on no net: | length 2.5
  Bottom Layer w0.5: 47.879,4.572 48.387,5.08 50.165,5.08

## Keep-outs
Keep-Out Layer:
  lines w0.254: 0,0 90.932,0 90.932,80.518 90.932,99.187 0,99.187 0,0

## Text inside footprints (layer, text, board x,y; h text height)
P1: Top Overlay "2" at 83.439,4.445 h1.27 r90; Top Overlay "1" at 85.979,4.953 h1.27 r90; Top Overlay "7" at 85.979,16.129 h1.27 r90; Top Overlay "8" at 83.439,16.129 h1.27 r90